# Altium PCB Assessment_2_PCB.PcbDoc (part 2 of 2)
Units mil, origin at the board's own origin, x right, y up, seen from the top; angles counter-clockwise.
Board outline 3937.01 x 2755.91 mil, 2 copper layers (Top Layer, Bottom Layer); 59 components, 57 nets, 310 pads, 181 vias.
Unrouted connection lines stored in the file: 6.
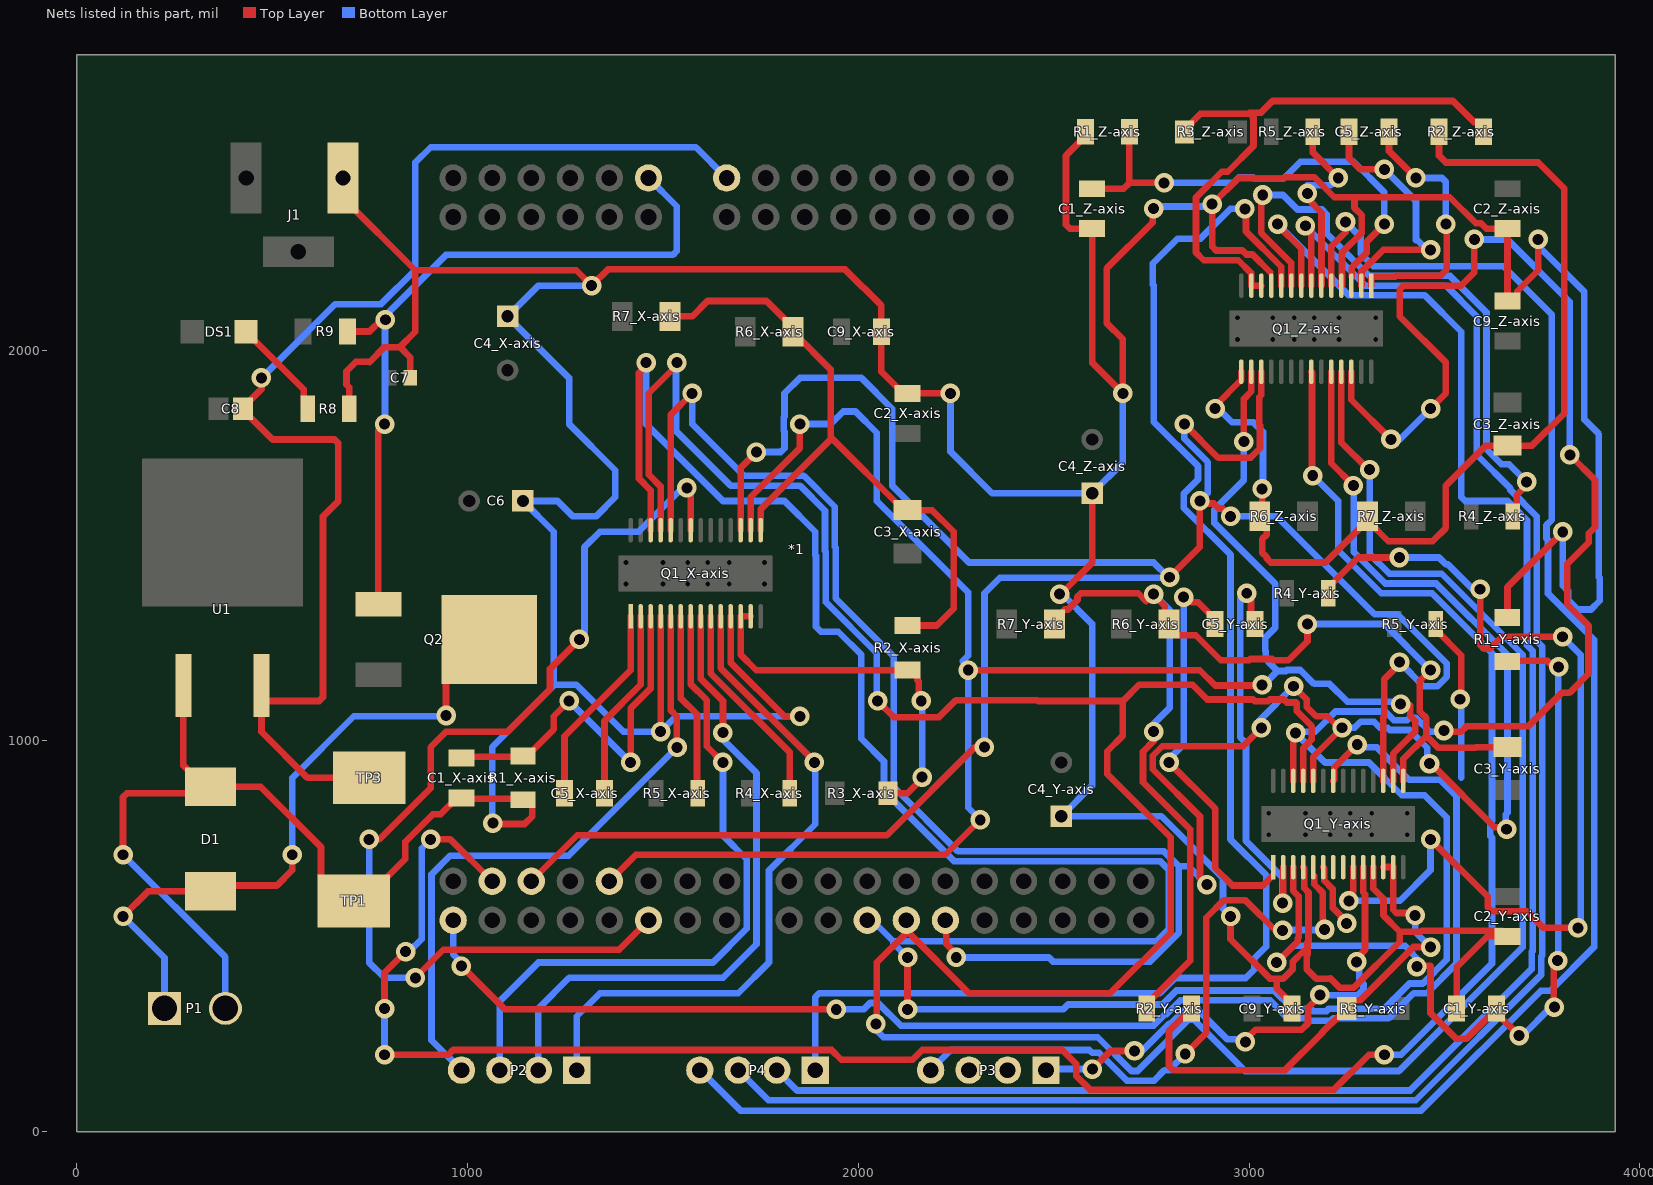
[diagram p2: the nets of this part, all layers, seen from the top]

## Via types
v1: diameter 50, hole 28, Top Layer to Bottom Layer, 181 vias

## Nets (pads, with @x,y where several pads share a name; then routed paths per layer and width w, separated by ;. In a path a pad name is that pad's centre, name@x,y a point inside that pad or via, vN(x,y) a via of type N, cw(c..) or ccw(c..) an arc to the next point about the centre after c; other vN are vias at no path point) (continued)
MODEL_0: *1.J2_10 Q1_X-axis.24 Q1_Y-axis.24 Q1_Z-axis.24 | length 6656.1
  Top Layer w17: Q1_X-axis.24@1519.69,1539.37 1519.69,1834.65 v1(1574.8,1889.76) ; *1.J2_10@2222.99,540.94 2224.97,538.97 2224.97,480.44 2250.65,454.76 v1(2250.65,445.83) ; v1(2891.94,632.05) 2889.83,632.05 2874.49,647.39 2874.49,806.98 2753.78,927.69 2753.78,962.07 2778.09,986.38 2984.51,986.38 v1(3031.5,1033.37) ; v1(3114.09,1139.89) 3147.48,1106.5 3147.48,1087.3 3171.79,1062.99 3200.27,1062.99 3229.53,1033.73 v1(3238.46,1033.73) 3164.37,959.65 Q1_Y-axis.24@3164.37,897.64 ; Q1_Z-axis.24@3210.63,1944.88 3210.63,1710.63 3267.23,1654.03 v1(3267.23,1653.54) ; v1(3461.95,942.12) 3465.71,942.12 3629.02,778.81 3646.08,778.81 3650.97,773.92 v1(3659.29,773.92)
  Bottom Layer w17: v1(1574.8,1889.76) 1574.8,1811.02 1707.28,1678.54 1860.75,1678.54 1939.76,1599.53 1939.76,1496.72 1941.89,1494.59 1941.89,1365.19 2090.87,1216.21 2090.87,881.93 2255.36,717.44 2782.48,717.44 2820.28,679.65 ; v1(2250.65,445.83) 2487.66,445.83 2498.29,435.2 2746.77,435.2 2820.28,508.71 2820.28,679.65 ; v1(2891.94,632.05) 2844.34,679.65 2820.28,679.65 ; v1(3031.5,1033.37) 3026.57,1038.29 3026.57,1052.37 v1(3114.09,1139.89) ; v1(3238.46,1033.73) 3270.31,1033.73 3285.59,1049.01 3319.96,1049.01 3335.24,1033.73 3354.6,1033.73 3360.41,1027.92 3410.94,1027.92 3456.2,982.66 3456.2,947.86 v1(3461.95,942.12) ; v1(3267.23,1653.54) 3267.72,1653.06 3267.72,1484.02 3348.78,1402.95 3478.94,1402.95 3661.42,1220.47 3661.42,816.38 3657.29,812.25 3657.29,775.92 v1(3659.29,773.92)
MODEL_1: *1.J2_8 Q1_X-axis.25 Q1_Y-axis.25 Q1_Z-axis.25 | length 8510.1
  Top Layer w17: Q1_X-axis.25@1494.09,1539.37 1494.09,1651.5 1463.73,1681.86 1463.73,1889.76 1535.43,1961.46 v1(1535.43,1968.5) ; v1(2045.11,275.59) 2047.24,277.72 2047.24,433.07 2122.99,508.82 *1.J2_8@2122.99,514.8 ; v1(2049.37,1102.36) 2090.87,1060.86 2206.61,1060.86 2250.24,1104.49 2458.13,1104.49 2460.26,1102.36 2677.17,1102.36 ; *1.J2_8@2122.99,540.94 *1.J2_8@2122.99,514.8 ; Q1_Y-axis.25@3138.78,897.64 3138.78,981.65 3160.61,1003.48 3160.61,1037.86 3122.48,1075.99 3122.48,1096.14 3120.23,1098.39 3096.9,1098.39 3089.18,1106.1 3052.97,1106.1 3048.69,1101.82 3014.31,1101.82 3010.03,1106.1 2893.15,1106.1 2855.39,1143.86 2718.67,1143.86 2677.17,1102.36 ; Q1_Z-axis.25@3236.22,1944.88 3236.22,1763.78 3305.44,1694.56 v1(3308.73,1694.56) ; *1.J2_8@2122.99,514.8 2283.46,354.33 2644.57,354.33 2799.49,509.26 2799.49,752.99 2637.13,915.36 2637.13,973.8 2677.17,1013.84 2677.17,1102.36
  Bottom Layer w17: v1(1535.43,1968.5) 1533.3,1966.37 1533.3,1793.47 1673.23,1653.54 1850.39,1653.54 1914.76,1589.17 1914.76,1486.37 1916.89,1484.24 1916.89,1354.84 2047.24,1224.49 2047.24,1104.49 v1(2049.37,1102.36) ; v1(2045.11,275.59) 2047.24,273.46 2047.24,258.54 2064.08,241.7 2612.99,241.7 2699.35,155.35 2714.41,155.35 2845.28,286.23 2859.36,286.23 2990.24,155.35 3383.7,155.35 3700.79,472.44 3700.79,1220.47 3493.31,1427.95 3359.14,1427.95 3308.73,1478.36 v1(3308.73,1694.56)
MODEL_2: *1.J2_6 Q1_X-axis.26 Q1_Y-axis.26 Q1_Z-axis.26 | length 9530.9
  Top Layer w17: v1(1456.69,1968.5) 1456.69,1960 1438.73,1942.05 1438.73,1671.5 1468.5,1641.73 Q1_X-axis.26@1468.5,1539.37 ; v1(2125.98,312.83) v1(2125.98,445.83) ; Q1_Y-axis.26@3113.19,897.64 3113.25,897.7 3113.25,1014.81 v1(3119.11,1020.67) ; Q1_Z-axis.26@3261.81,1944.88 3261.81,1873.21 v1(3363.36,1771.65) ; v1(3464.57,1850.39) 3503.94,1889.76 3503.94,1968.5 3385.83,2086.61 3385.83,2155.4 3395.79,2165.35 3543.31,2165.35 3576.6,2198.65 v1(3576.6,2283.46) ; v1(3498.95,1026.67) 3500.89,1026.67 3503.94,1023.62 3543.31,1023.62 3557.68,1037.99 3715.16,1037.99 3800.22,1123.05 3819.83,1123.05 3868.9,1172.12 3868.9,1295.14 3814.64,1349.4 3814.64,1452.8 3869.47,1507.64 3869.47,1530.97 3885.4,1546.89 3885.4,1667.91 v1(3821.03,1732.28)
  Bottom Layer w17: v1(1456.69,1968.5) 1456.69,1811.02 1653.54,1614.17 1811.02,1614.17 1889.76,1535.43 1889.76,1476.01 1891.89,1473.88 1891.89,1292.24 1904.61,1279.53 1948.82,1279.53 2007.87,1220.47 2007.87,1005.7 2065.87,947.7 2065.87,871.58 2245.01,692.44 2772.12,692.44 2795.28,669.29 2795.28,519.06 2763.54,487.33 2089.37,487.33 2035.75,540.94 *1.J2_6@2022.99,540.94 ; 2089.37,482.45 v1(2125.98,445.83) ; v1(2125.98,312.83) 2524.11,312.83 2536.87,325.59 2778.58,325.59 2814.22,361.23 3064.24,361.23 3110.51,314.96 3157.65,314.96 3164.04,308.57 3198.41,308.57 3204.8,314.96 3346.46,314.96 3410.83,379.33 3444.93,379.33 3506.07,440.47 3506.07,804.47 3449.5,861.04 3390.93,861.04 3307.09,944.88 3194.9,944.88 v1(3119.11,1020.67) 3122.02,1023.58 3169.61,1023.58 3221.27,1075.23 3348.45,1075.23 3370.77,1052.92 3405.15,1052.92 3410.96,1058.73 3427.33,1058.73 3462.44,1023.62 3495.89,1023.62 v1(3498.95,1026.67) ; v1(3363.36,1771.65) 3385.83,1771.65 v1(3464.57,1850.39) ; v1(3576.6,2283.46) 3661.42,2283.46 3821.03,2123.85 v1(3821.03,1732.28)
Net*1_J24_2: *1.J24_2 Q2.1 R9.2 | length 1887.9
  Top Layer w17: R9.2@692.68,2047.99 748.78,2047.99 778.82,2078.03 v1(789.78,2078.03) ; Q2.1@771.65,1350 771.65,1795.28 v1(787.4,1811.02)
  Bottom Layer w17: v1(787.4,1811.02) 788.59,1812.21 788.59,2076.84 v1(789.78,2078.03) ; v1@787.4,2078.03 787.4,2086.61 944.88,2244.09 1525.47,2244.09 1535.43,2254.05 1535.43,2368.5 *1.J24_2@1462.99,2440.94
Net*1_J25_16: *1.J25_16 C8.2 TP3.1 U1.3 | length 3324
  Top Layer w17: U1.3@472.44,1141.73 U1.3@472.44,1114.53 ; v1(472.44,1929.13) 472.44,1900.59 425.2,1853.35 C8.2@425.2,1850.39 425.2,1847.44 500.98,1771.65 659.33,1771.65 669.29,1761.7 669.29,1614.17 629.92,1574.8 629.92,1112.32 619.96,1102.36 484.61,1102.36 U1.3@472.44,1114.53 ; TP3.1@787.4,905.51 590.55,905.51 472.44,1023.62 U1.3@472.44,1114.53
  Bottom Layer w17: v1(472.44,1929.13) 661.34,2118.03 778.72,2118.03 866.14,2205.45 866.14,2480.31 905.51,2519.68 1584.25,2519.68 *1.J25_16@1662.99,2440.94
NetC5_X-axis_1: C5_X-axis.1 Q1_X-axis.2 | length 491.1
  Top Layer w17: C5_X-axis.1@1350.39,866.14 1350.39,1051.18 1442.91,1143.7 Q1_X-axis.2@1442.91,1318.9
NetC5_X-axis_2: C5_X-axis.2 Q1_X-axis.1 | length 522.9
  Top Layer w17: C5_X-axis.2@1248.03,866.14 1248.03,1011.81 1417.32,1181.1 Q1_X-axis.1@1417.32,1318.9
NetC5_Y-axis_1: C5_Y-axis.1 Q1_Y-axis.2 | length 1035.8
  Top Layer w17: v1(2994.26,1377.95) 2994.26,1369.02 3005.1,1358.18 3005.1,1309.86 C5_Y-axis.1@3015.75,1299.21 ; v1(3085.76,584.93) 3085.76,592.58 3079.33,599.01 3087.6,607.28 Q1_Y-axis.2@3087.6,677.17
  Bottom Layer w17: v1(2994.26,1377.95) 2992.13,1377.95 2977.76,1363.58 2977.76,1009.11 2992.13,994.74 2992.13,744.02 3085.76,650.39 3085.76,594.55 3080.94,589.74 v1(3085.76,584.93)
NetC5_Y-axis_2: C5_Y-axis.2 Q1_Y-axis.1 | length 1048.4
  Top Layer w17: v1(2795.28,944.88) 2913.39,826.77 2913.39,674.24 2957.5,630.13 3035.37,630.13 Q1_Y-axis.1@3059.41,654.17 ; v1(2832.52,1367.84) 2841.45,1367.84 2854.15,1355.14 2869.27,1355.14 2913.39,1311.02 C5_Y-axis.2@2913.39,1299.21
  Bottom Layer w17: v1(2795.28,944.88) 2795.28,953.81 2832.52,991.05 v1(2832.52,1367.84)
NetC5_Z-axis_1: C5_Z-axis.1 Q1_Z-axis.2 | length 667.6
  Top Layer w17: C5_Z-axis.1@3255.91,2559.06 3255.91,2492.13 3285.23,2462.8 v1(3346.46,2462.8) ; Q1_Z-axis.2@3287.4,2165.35 3287.99,2165.94 3287.99,2201.09 3343.76,2256.85 v1(3464.57,2256.85)
  Bottom Layer w17: v1(3346.46,2462.8) 3427.33,2381.93 3427.33,2281.33 3431.16,2281.33 3455.64,2256.85 v1(3464.57,2256.85)
NetC5_Z-axis_2: C5_Z-axis.2 Q1_Z-axis.1 | length 674.9
  Top Layer w17: Q1_Z-axis.1@3312.99,2165.35 3312.99,2185.76 3315.59,2188.35 3373.47,2188.35 3375.47,2190.35 3489.57,2190.35 3506.07,2206.85 3506.07,2320.7 v1(3503.94,2322.83) ; C5_Z-axis.2@3358.27,2559.06 3358.27,2509.68 3427.01,2440.94 v1(3427.33,2440.94)
  Bottom Layer w17: v1(3427.33,2440.94) 3493.98,2440.94 3503.94,2430.99 v1(3503.94,2322.83)
NetD1_1: D1.1 P1.1 Q2.4 | length 1700.5
  Top Layer w17: v1(118.11,551.18) 181.85,614.92 D1.1@342.28,614.92 357.28,629.92 511.81,629.92 551.18,669.29 v1(551.18,708.66) ; v1(944.88,1065.12) 944.88,1154.17 1050.56,1259.84 Q2.4@1055.12,1259.84
  Bottom Layer w17: v1(118.11,551.18) 224.17,445.12 P1.1@224.17,315.71 ; v1(551.18,708.66) 551.18,905.51 708.66,1062.99 942.75,1062.99 v1(944.88,1065.12)
NetDS1_1: DS1.1 R8.1 | length 262.1
  Top Layer w17: DS1.1@433.07,2047.24 580.35,1899.96 580.35,1860.59 R8.1@590.55,1850.39
NetP2_1: P2.1 Q1_X-axis.10 | length 1721.9
  Top Layer w17: Q1_X-axis.10@1647.64,1318.9 1647.64,1187.01 1887.63,947.01 v1(1887.63,944.88)
  Bottom Layer w17: P2.1@1279.53,157.48 1279.53,295.28 1338.58,354.33 1692.59,354.33 1771.49,433.23 1771.49,668.65 1889.76,786.92 1889.76,942.75 v1(1887.63,944.88)
NetP2_2: P2.2 Q1_X-axis.8 | length 1682.6
  Top Layer w17: Q1_X-axis.8@1596.46,1318.9 1596.46,1159.45 1653.54,1102.36 v1(1653.54,1021.49)
  Bottom Layer w17: P2.2@1181.1,157.48 1181.1,314.96 1259.84,393.7 1653.54,393.7 1739.49,479.65 1739.49,917.62 1653.54,1003.57 v1(1653.54,1021.49)
NetP2_3: P2.3 Q1_X-axis.7 | length 1744.4
  Top Layer w17: Q1_X-axis.7@1570.87,1318.9 1570.87,1145.67 1612.04,1104.49 1612.04,986.38 v1(1653.54,944.88)
  Bottom Layer w17: P2.3@1082.68,157.48 1082.68,334.65 1181.1,433.07 1627.95,433.07 1714.49,519.61 1714.49,697.33 1653.54,758.27 v1(1653.54,944.88)
NetP2_4: P2.4 Q1_X-axis.5 | length 1637.7
  Top Layer w17: Q1_X-axis.5@1519.69,1318.9 1519.69,1078.74 1535.43,1062.99 1535.43,984.28 v1(1536.01,983.7)
  Bottom Layer w17: P2.4@984.25,157.48 907.64,234.09 907.64,658.43 955.75,706.53 1258.84,706.53 v1(1536.01,983.7)
NetP3_1: P3.1 Q1_Y-axis.10 | length 1332.3
  Top Layer w17: v1(2598.98,160.27) 2645.22,206.51 v1(2706.88,206.51) ; v1(2990.69,229.83) 2990.69,234.79 3017.13,261.22 3134.95,261.22 3150.87,277.14 3150.87,317.17 3174.91,341.22 3174.91,350.07 v1(3181.22,350.07) ; v1(3275.4,434.4) 3275.4,443.33 3296.98,464.91 3296.98,607.74 3292.32,612.39 Q1_Y-axis.10@3292.32,677.17
  Bottom Layer w17: P3.1@2480.32,157.48 2483.1,160.27 2597.87,160.27 2598.43,159.71 v1(2598.98,160.27) ; v1(2706.88,206.51) 2709.49,203.89 2723.58,203.89 2795.28,275.59 2799.29,275.59 2834.93,311.23 2869.72,311.23 2944.8,236.14 2984.38,236.14 v1(2990.69,229.83) ; v1(3181.22,350.07) 3181.22,349.49 3278.91,349.49 3293.08,363.66 3293.08,377.74 3281.72,389.1 3281.72,428.09 v1(3275.4,434.4)
NetP3_2: P3.2 Q1_Y-axis.8
NetP3_3: P3.3 Q1_Y-axis.7
NetP3_4: P3.4 Q1_Y-axis.5 | length 1613.2
  Top Layer w17: v1(2836.78,198.98) 2890.52,252.72 2890.52,547.63 2935.57,592.68 2990,592.68 3070.87,511.81 3074.08,515.03 v1(3085.76,515.03) ; Q1_Y-axis.5@3166.96,654.17 3166.96,633.12 3188.98,611.11 3188.98,522.18 v1(3193.76,517.4)
  Bottom Layer w17: P3.4@2185.04,157.48 2236.54,208.98 2591.21,208.98 2598.43,201.77 2616.17,201.77 2687.58,130.35 2756.81,130.35 2783.94,157.48 2795.28,157.48 v1(2836.78,198.98) ; v1(3085.76,515.03) 3088.98,511.81 3093.38,516.22 3192.57,516.22 v1(3193.76,517.4)
NetP4_1: P4.1 Q1_Z-axis.10 | length 3839.3
  Top Layer w17: v1(2989.42,2361.66) 2992.13,2358.95 2992.13,2304.25 3082.68,2213.7 Q1_Z-axis.10@3082.68,2165.35
  Bottom Layer w17: P4.1@1889.76,157.48 1889.76,344.37 1899.72,354.33 2771.96,354.33 2810.9,393.27 2991.69,393.27 3013.39,414.96 3013.39,443.04 3044.26,473.91 3044.26,656.53 2952.76,748.03 2952.76,1476.74 2832.52,1596.98 2832.52,1632.09 2869.37,1668.95 2869.37,1703.33 2755.91,1816.8 2755.91,2165.72 2753.78,2167.85 2753.78,2221.91 2817.46,2285.59 2876.15,2285.59 2952.76,2362.2 2988.87,2362.2 v1(2989.42,2361.66)
NetP4_2: P4.2 Q1_Z-axis.8 | length 4620.5
  Top Layer w17: v1(3073,2322.83) 3073,2320.7 3133.86,2259.84 Q1_Z-axis.8@3133.86,2165.35
  Bottom Layer w17: P4.2@1791.34,157.48 1843.47,105.35 3412.44,105.35 3723.31,416.23 3723.31,459.61 3725.79,462.09 3725.79,1230.83 3711.47,1245.14 3711.47,1564.12 3661.42,1614.17 3553.27,1614.17 3543.31,1624.13 3543.31,2047.24 3450.2,2140.35 3255.48,2140.35 v1(3073,2322.83)
NetP4_3: P4.3 Q1_Z-axis.7 | length 4673.3
  Top Layer w17: v1(3144.13,2318.58) 3149.49,2318.58 3159.45,2308.62 Q1_Z-axis.7@3159.45,2165.35
  Bottom Layer w17: P4.3@1692.91,157.48 1770.04,80.35 3426.81,80.35 3748.31,401.86 3748.31,449.26 3750.79,451.73 3750.79,1241.18 3736.47,1255.5 3736.47,1574.47 3668.95,1642 3668.95,1646.01 3582.68,1732.28 3582.68,2086.61 3503.94,2165.35 3297.35,2165.35 v1(3144.13,2318.58)
NetP4_4: P4.4 Q1_Z-axis.5 | length 5009.4
  Top Layer w17: Q1_Z-axis.5@3210.63,2165.35 3210.63,2265.75 3246.98,2302.09 v1(3246.98,2328.52)
  Bottom Layer w17: P4.4@1594.49,157.48 1698.23,53.74 3440.3,53.74 3746.84,360.29 3771.17,360.29 3883.27,472.38 3883.27,1258.91 3765.16,1377.02 3765.16,1514.31 3761.47,1517.99 3761.47,1552.37 3775.27,1566.16 3775.27,2090.87 3650.79,2215.35 3318.06,2215.35 3285.68,2247.74 3285.68,2289.82 v1(3246.98,2328.52)
NetQ1_X-axis_6: Q1_X-axis.6 R5_X-axis.1 | length 470.7
  Top Layer w17: Q1_X-axis.6@1545.28,1318.9 1545.28,1110.06 1587.04,1068.29 1587.04,867.68 R5_X-axis.1@1588.58,866.14
NetQ1_X-axis_9: Q1_X-axis.9 R4_X-axis.1 | length 536.7
  Top Layer w17: Q1_X-axis.9@1622.05,1318.9 1622.05,1173.23 1824.8,970.47 R4_X-axis.1@1824.8,866.14
NetQ1_X-axis_12: Q1_X-axis.12 Q1_X-axis.13 R2_X-axis.1 R3_X-axis.2 | length 970.1
  Top Layer w17: Q1_X-axis.13@1724.41,1318.9 Q1_X-axis.12@1698.82,1318.9 1698.82,1221.06 1738.78,1181.1 R2_X-axis.1@2125.98,1181.1 2137.8,1181.1 2150.95,1167.95 2150.95,1156.14 2154.78,1152.31 2154.78,1108.68 v1(2161.09,1102.36) ; R3_X-axis.2@2075.79,866.14 2125.99,866.14 2163.22,903.38 v1(2163.22,907.48)
  Bottom Layer w17: v1(2161.09,1102.36) 2163.22,1100.23 v1(2163.22,907.48)
NetQ1_Y-axis_6: Q1_Y-axis.6 R5_Y-axis.1 | length 616.3
  Top Layer w17: Q1_Y-axis.6@3189.96,677.17 3192.56,674.57 3192.56,642.88 3213.98,621.46 3213.98,573.36 3235.26,552.08 3235.26,547.25 v1(3249.66,532.84) ; R5_Y-axis.1@3478.35,1299.21 3478.35,1284.45 3543.31,1219.49 3543.31,1102.36 3540.45,1099.5 v1(3540.45,1106.62)
  Bottom Layer w17: v1@3533.32,1099.5 v1(3540.45,1106.62) 3543.31,1103.76 3543.31,905.51
NetQ1_Y-axis_9: Q1_Y-axis.9 R4_Y-axis.1 | length 2541.9
  Top Layer w17: R4_Y-axis.1@3202.76,1377.95 3202.76,1392.72 3279.49,1469.45 v1(3384.84,1469.45) v1@3384.84,1456.69 ; v1(3255.48,590.55) 3255.48,604.13 3266.73,615.39 Q1_Y-axis.9@3266.73,677.17 ; v1(3464.57,748.03) 3611.45,601.15 3611.45,573.87 3621.39,563.94 3711.28,563.94 3753.75,521.48 v1(3841.77,521.48) 3842.24,521.01 v1@3841.77,520.54 ; v1@3599.06,1380.89 v1(3591.73,1388.22) 3591.73,1245.52 3601.69,1235.56 3615.77,1235.56 3646.89,1266.68 v1(3802.4,1266.68)
  Bottom Layer w17: v1(3255.48,590.55) 3385.83,590.55 3464.57,669.29 v1(3464.57,748.03) ; v1(3384.84,1469.45) 3486.11,1469.45 3503.11,1452.45 3508.18,1452.45 3582.07,1378.56 v1(3591.73,1388.22) ; v1(3802.4,1266.68) 3848.6,1220.47 3848.6,521.48 v1(3841.77,521.48)
NetQ1_Y-axis_12: Q1_Y-axis.12 Q1_Y-axis.13 R2_Y-axis.1 R3_Y-axis.2 | length 1275.9
  Top Layer w17: R2_Y-axis.1@2852.36,314.96 2795.28,257.87 2795.28,167.44 2805.23,157.48 3092.52,157.48 3186.85,251.8 3186.85,253.41 3211.16,277.72 3212.76,277.72 3228.97,293.93 3233.9,293.93 3250,310.04 R3_Y-axis.2@3250,314.96 3250,319.88 3266.11,335.99 3284.2,335.99 3420.66,472.44 v1(3464.57,472.44) ; Q1_Y-axis.12@3343.5,677.17 Q1_Y-axis.13@3369.1,677.17 3369.1,567.91 3377.38,559.63 3418.88,559.63 v1(3425.2,553.31)
  Bottom Layer w17: v1(3425.2,553.31) 3425.2,511.81 v1(3464.57,472.44)
NetQ1_Z-axis_6: Q1_Z-axis.6 R5_Z-axis.1 | length 503.5
  Top Layer w17: v1(3149.61,2401.58) 3149.61,2388.07 3185.63,2352.04 3185.63,2165.94 Q1_Z-axis.6@3185.04,2165.35 ; R5_Z-axis.1@3163.39,2559.06 3163.39,2505.91 v1(3228.35,2440.94)
  Bottom Layer w17: v1(3149.61,2401.58) 3149.61,2422.16 3209.57,2422.16 v1(3228.35,2440.94)
NetQ1_Z-axis_9: Q1_Z-axis.9 R4_Z-axis.1 | length 1585
  Top Layer w17: v1(3035.16,2397.32) 3031.5,2393.65 3031.5,2300.23 3107.68,2224.05 3107.68,2165.94 Q1_Z-axis.9@3108.27,2165.35 ; R4_Z-axis.1@3675.2,1574.8 3685.4,1585 3685.4,1629.22 3710.45,1654.27 v1(3710.45,1663.2)
  Bottom Layer w17: v1(3035.16,2397.32) 3039.42,2401.57 3043.68,2397.32 3086.83,2397.32 3124.06,2360.08 3186.85,2360.08 3199,2347.92 3199,2299.06 3307.71,2190.35 3514.29,2190.35 3607.68,2096.97 3607.68,1746.65 3646.25,1708.09 3665.56,1708.09 v1(3710.45,1663.2)
NetQ1_Z-axis_12: Q1_Z-axis.12 Q1_Z-axis.13 R2_Z-axis.1 R3_Z-axis.2 | length 1492.8
  Top Layer w17: R3_Z-axis.2@2834.65,2559.06 2834.65,2563.98 2875.75,2605.08 3001.91,2605.08 ; Q1_Z-axis.12@3031.5,2165.35 Q1_Z-axis.13@3005.91,2165.35 3005.31,2165.94 3005.31,2197.63 2972.6,2230.35 2883.97,2230.35 2864.22,2250.11 2864.22,2391.05 2930.04,2456.87 2945.75,2456.87 3011.58,2522.69 3011.58,2595.42 3001.91,2605.08 ; R2_Z-axis.1@3600.39,2559.06 3600.39,2570.87 3587.24,2584.02 3575.43,2584.02 3521.65,2637.8 3060.33,2637.8 3030.74,2608.21 3001.91,2608.21 3001.91,2605.08
RESET: *1.J1_9 Q1_X-axis.16 Q1_Y-axis.16 Q1_Z-axis.16 | length 5006
  Top Layer w17: *1.J1_9@1362.99,640.94 1430.71,708.66 2222.59,708.66 v1(2312.08,798.15) ; Q1_X-axis.16@1724.41,1539.37 1724.41,1623.7 1850.39,1749.69 v1(1850.39,1811.02) ; v1(2281.33,1181.1) 2874.02,1181.1 2913.39,1141.73 3031.5,1141.73 3031.5,1143.32 v1(3033.63,1143.32) ; v1(2986.73,1766.25) 2986.73,1875.54 3005.91,1894.72 Q1_Z-axis.16@3005.91,1944.88 ; Q1_Y-axis.16@3369.1,897.64 3369.1,967.52 3425.2,1023.62 3425.2,1051.7 3412.44,1064.46 3412.44,1090.71 3409.23,1093.92 3394.27,1093.92 3390.86,1097.32 v1(3387.96,1094.42)
  Bottom Layer w17: v1(1850.39,1811.02) 1929.13,1811.02 1961.46,1843.35 1992.74,1843.35 2047.24,1788.84 2047.24,1614.17 2281.33,1380.08 2281.33,1218.34 2268.14,1205.14 2268.14,1203.23 2281.33,1190.03 v1(2281.33,1181.1) 2281.33,828.9 v1(2312.08,798.15) ; v1(2986.73,1766.25) 2986.73,1667.46 2911.26,1591.99 2911.26,1557.61 3067.36,1401.51 3067.36,1289.27 3066.16,1289.27 3041.85,1264.96 3041.85,1230.58 3042.98,1229.44 3042.98,1215.91 3048.92,1209.97 3048.92,1203.28 3073.23,1178.97 ; v1(3033.63,1143.32) 3037.58,1143.32 3073.23,1178.97 ; v1(3387.96,1094.42) 3387.96,1100.23 3251.93,1100.23 3206.17,1145.99 3166.67,1145.99 3131.28,1181.39 3096.9,1181.39 3094.48,1178.97 3073.23,1178.97
SLEEP: *1.J1_5 Q1_X-axis.17 Q1_Y-axis.17 Q1_Z-axis.17 | length 6160.6
  Top Layer w17: *1.J1_5@1162.99,640.94 1280.71,758.66 2073.09,758.66 2298.68,984.25 v1(2322.83,984.25) ; Q1_X-axis.17@1698.82,1539.37 1698.82,1698.82 v1(1739.34,1739.34) ; v1(2796.92,1418.96) 2874.02,1496.06 v1(2874.02,1614.17) 2880.33,1607.86 2909.74,1607.86 2922.57,1595.03 2932.53,1595.03 v1(2952.76,1574.8) ; v1(2834.65,1811.02) 2920.92,1724.75 3003.92,1724.75 3028.23,1749.06 3028.23,1807.96 3025.86,1810.33 3025.86,1879.32 3031.5,1884.95 Q1_Z-axis.17@3031.5,1944.88 ; Q1_Y-axis.17@3343.5,897.64 3343.5,1060.04 3346.46,1062.99 3346.46,1158.23 3385.19,1196.97 v1(3385.19,1201.78)
  Bottom Layer w17: v1(1739.34,1739.34) 1801.07,1739.34 1811.02,1749.3 1811.02,1791.7 1808.89,1793.83 1808.89,1828.21 1811.02,1830.34 1811.02,1889.76 1850.39,1929.13 2007.87,1929.13 2086.61,1850.39 2086.61,1653.54 2283.46,1456.69 2755.91,1456.69 2793.63,1418.96 v1(2796.92,1418.96) ; v1(2322.83,984.25) 2322.83,1377.95 2362.2,1417.32 v1@2795.28,1417.32 ; v1(2834.65,1811.02) 2834.65,1773.41 2894.37,1713.69 2894.37,1634.53 v1(2874.02,1614.17) ; v1(2952.76,1574.8) 3070.87,1574.8 3321.46,1324.21 3380.15,1324.21 3506.07,1198.29 3506.07,1163.91 3481.76,1139.6 3447.38,1139.6 v1(3385.19,1201.78)
STEP_1: *1.J1_12 Q1_X-axis.22 | length 2635.8
  Top Layer w17: v1(748.03,748.03) 773.93,748.03 905.51,879.62 905.51,984.25 944.88,1023.62 1102.36,1023.62 1210.88,1132.14 1210.88,1184.38 v1(1286.34,1259.84) ; v1(866.14,393.7) 937.85,465.41 1387.46,465.41 *1.J1_12@1462.99,540.94 ; v1(1561.19,1647.84) 1561.19,1638.91 1570.87,1629.23 Q1_X-axis.22@1570.87,1539.37
  Bottom Layer w17: v1(748.03,748.03) 748.03,433.07 787.4,393.7 v1(866.14,393.7) ; v1(1286.34,1259.84) 1299.21,1259.84 1299.21,1496.06 1338.58,1535.43 1437.37,1535.43 1543.47,1641.53 1554.87,1641.53 v1(1561.19,1647.84)
STEP_2: *1.J1_2 Q1_Y-axis.22 | length 3714.5
  Top Layer w17: v1(984.25,423.91) 1095.33,312.83 v1(1943.5,312.83) ; Q1_Y-axis.22@3215.55,897.64 3218.15,900.23 3218.15,931.92 3276.62,990.4 v1(3277,990.4)
  Bottom Layer w17: *1.J1_2@962.99,540.94 962.99,454.1 984.25,432.84 v1(984.25,423.91) ; v1(1943.5,312.83) 2013.55,312.83 2030.05,329.33 2050.79,329.33 2108.79,271.33 2755.66,271.33 2784.92,300.59 2788.94,300.59 2824.57,336.23 3053.89,336.23 3100.16,289.96 3147.29,289.96 3153.68,283.57 3208.77,283.57 3215.16,289.96 3356.81,289.96 3421.18,354.33 3455.28,354.33 3531.07,430.11 3531.07,858.63 3489.08,900.62 3409.67,900.62 3326.2,984.08 3283.32,984.08 v1(3277,990.4)
STEP_3: *1.J1_3 Q1_Z-axis.22 | length 5647.3
  Top Layer w17: v1(787.4,196.85) 950.79,196.85 962.92,208.98 1931.6,208.98 1956.49,184.09 2138.82,184.09 2163.71,208.98 2522.15,208.98 2557.48,173.65 2557.48,143.08 2593.07,107.48 3217.72,107.48 3307.09,196.85 v1(3346.46,196.85) ; v1(787.4,314.96) 787.4,406.66 v1(841.51,460.77) ; v1(905.51,748.03) 905.62,747.93 956.01,747.93 *1.J1_3@1062.99,640.94 ; Q1_Z-axis.22@3159.45,1944.88 3161.33,1943 3161.33,1681.19 v1(3163.2,1679.32)
  Bottom Layer w17: v1(787.4,196.85) v1(787.4,314.96) ; v1(841.51,460.77) 850.44,460.77 882.64,492.97 882.64,725.16 v1(905.51,748.03) ; v1(3163.2,1679.32) 3228.35,1614.17 3228.35,1488.03 3338.43,1377.95 3468.58,1377.95 3622.05,1224.49 3622.05,795.37 3617.79,791.11 3617.79,756.73 3622.05,752.47 3622.05,429.96 3388.93,196.85 v1(3346.46,196.85)
V3P3OUT_X-axis: C3_X-axis.1 Q1_X-axis.15 R2_X-axis.2 R6_X-axis.1 R7_X-axis.1 | length 1740.4
  Top Layer w17: R7_X-axis.1@1517.72,2086.61 1574.8,2086.61 1614.17,2125.98 1764.76,2125.98 1832.68,2058.07 R6_X-axis.1@1832.68,2047.24 1929.13,1950.79 1929.13,1777.56 ; Q1_X-axis.15@1750,1539.37 1750,1592.52 1929.13,1771.65 1929.13,1777.56 ; R2_X-axis.2@2125.98,1295.28 2200.79,1295.28 2244.09,1338.58 2244.09,1535.43 2188.98,1590.55 C3_X-axis.1@2125.98,1590.55 2116.14,1590.55 1929.13,1777.56
V3P3OUT_Y-axis: C3_Y-axis.1 Q1_Y-axis.15 R2_Y-axis.2 R6_Y-axis.1 R7_Y-axis.1 | length 2960.6
  Top Layer w17: R7_Y-axis.1@2501.97,1299.21 2501.97,1310.04 2528.38,1336.45 2536.87,1336.45 2561.18,1360.76 2561.18,1369.26 2569.88,1377.95 2716.54,1377.95 2737.29,1357.2 ; R2_Y-axis.2@2738.19,314.96 2738.19,326.77 2849.49,438.07 2849.49,773.71 2728.78,894.42 2728.78,972.43 2755.91,999.56 v1(2755.91,1023.62) ; v1(2755.91,1375.82) 2755.91,1373.94 2784.73,1345.11 2784.73,1309.76 R6_Y-axis.1@2795.28,1299.21 2795.28,1288.39 2813.35,1270.31 2863.83,1270.31 2927.76,1206.39 3000.52,1206.39 3003.95,1209.82 3059.04,1209.82 3062.48,1206.39 3100.66,1206.39 3149.61,1255.34 v1(3149.61,1299.21) ; Q1_Y-axis.15@3394.69,897.64 3394.69,953.74 3453.94,1012.99 ; v1(3464.57,1181.1) 3437.44,1153.97 3437.44,1074.82 3453.94,1058.32 3453.94,1012.99 ; C3_Y-axis.1@3661.42,984.25 3581.37,984.25 3579.24,982.12 3484.81,982.12 3453.94,1012.99
  Bottom Layer w17: v1(2755.91,1023.62) 2755.91,1043.67 2797.41,1085.17 2797.41,1334.32 v1(2755.91,1375.82) ; v1(3149.61,1299.21) 3346.46,1299.21 v1(3464.57,1181.1)
V3P3OUT_Z-axis: C3_Z-axis.1 Q1_Z-axis.15 R2_Z-axis.2 R6_Z-axis.1 R7_Z-axis.1 | length 2647.6
  Top Layer w17: v1(2913.39,1850.39) 2913.39,1857.55 2980.31,1924.48 Q1_Z-axis.15@2980.31,1944.88 ; v1(3033.63,1644.97) 3033.63,1580.87 R6_Z-axis.1@3027.56,1574.8 3045.63,1556.73 3045.63,1528.49 3033.63,1516.48 3033.63,1482.1 3045.63,1470.09 3045.63,1466.65 3055.59,1456.69 3195.87,1456.69 R7_Z-axis.1@3303.15,1563.98 ; R7_Z-axis.1@3303.15,1574.8 R7_Z-axis.1@3303.15,1563.98 ; R2_Z-axis.2@3486.22,2559.06 3486.22,2498.03 3503.94,2480.32 3740.16,2480.32 3806.66,2413.82 3806.66,1838.15 3724.41,1755.91 C3_Z-axis.1@3661.42,1755.91 3606.3,1755.91 3503.94,1653.54 3503.94,1545.39 3469.5,1510.95 3356.17,1510.95 R7_Z-axis.1@3303.15,1563.98
  Bottom Layer w17: v1(2913.39,1850.39) 2921.91,1850.39 2957.02,1815.28 3011.45,1815.28 3035.76,1790.97 3035.76,1656 3033.63,1653.87 v1(3033.63,1644.97)
VCP_X-axis: C1_X-axis.1 Q1_X-axis.3 R1_X-axis.1 | length 973.5
  Top Layer w17: C1_X-axis.1@984.25,956.69 986.71,959.15 1139.27,959.15 R1_X-axis.1@1141.73,961.61 1152.56,961.61 1220.47,1029.53 1220.47,1062.99 v1(1259.84,1102.36) ; v1(1417.32,944.88) 1417.32,1082.75 1468.5,1133.94 Q1_X-axis.3@1468.5,1318.9
  Bottom Layer w17: v1(1259.84,1102.36) v1(1417.32,944.88)
VCP_Y-axis: C1_Y-axis.1 Q1_Y-axis.3 R1_Y-axis.1 | length 2327.3
  Top Layer w17: v1(3070.87,433.07) 3124.61,486.81 3124.61,495.19 3127.26,497.84 3127.26,602.12 3113.19,616.19 Q1_Y-axis.3@3113.19,677.17 ; v1(3429.49,422.58) 3431.24,420.83 3432.66,420.83 3440.31,428.48 3444.16,424.63 3459.31,424.63 3459.85,424.09 3464.57,424.09 3464.57,303.44 3530.65,237.36 3556.25,237.36 3608.89,290 3620.7,290 3622.05,291.34 3622.05,303.15 C1_Y-axis.1@3633.86,314.96 3633.86,303.15 v1(3691.13,245.88) ; R1_Y-axis.1@3661.42,1203.74 3662.69,1205.01 3764.07,1205.01 3779.53,1189.55 v1(3792.29,1189.55) ; v1(3781.66,318.79) 3779.53,318.79 3779.53,427.66 3779.85,427.66 v1(3789.81,437.61)
  Bottom Layer w17: v1(3070.87,433.07) 3113.7,475.9 3399.1,475.9 3417.62,457.38 3417.62,455.25 3437.85,435.03 3437.85,426.01 3432.66,420.83 3431.24,420.83 v1(3429.49,422.58) ; v1(3691.13,245.88) 3691.49,245.52 3699.58,245.52 3772.85,318.79 v1(3781.66,318.79) 3780.24,317.37 v1@3780.24,315.67 ; v1(3789.81,437.61) 3791.05,438.85 3791.05,1188.31 v1(3792.29,1189.55)
VCP_Z-axis: C1_Z-axis.1 Q1_Z-axis.3 R1_Z-axis.1 | length 1193.7
  Top Layer w17: C1_Z-axis.1@2598.43,2413.39 2679.02,2413.39 2693.9,2428.27 ; R1_Z-axis.1@2693.9,2559.06 2693.9,2428.27 ; v1(2782.6,2428.27) 2693.9,2428.27 ; Q1_Z-axis.3@3262.99,2188.35 3262.99,2211.45 3301.57,2250.02 3301.57,2277.95 v1(3346.46,2322.83)
  Bottom Layer w17: v1(2782.6,2428.27) 2960.13,2428.27 2974.94,2443.07 3009.32,2443.07 3013.58,2438.82 3088.06,2438.82 3131.69,2482.44 3268.13,2482.44 3346.46,2404.11 v1(3346.46,2322.83)
VMA_X-axis: C1_X-axis.2 C1_Y-axis.2 C1_Z-axis.2 C2_X-axis.1 C2_Y-axis.1 C2_Z-axis.1 C4_X-axis.1 C4_Y-axis.1 C4_Z-axis.1 C6.1 C7.2 C9_X-axis.1 C9_Y-axis.1 C9_Z-axis.1 D1.2 J1.1 P1.2 Q1_X-axis.4 Q1_X-axis.11 Q1_Y-axis.4 Q1_Y-axis.11 Q1_Z-axis.4 Q1_Z-axis.11 R1_X-axis.2 R1_Y-axis.2 R1_Z-axis.2 R8.2 TP1.1 U1.1 | length 17263.9
  Top Layer w17: v1(118.11,708.66) 118.11,856.18 128.07,866.14 325.79,866.14 D1.2@342.28,882.64 ; U1.1@272.44,1141.73 272.44,936.73 326.54,882.64 D1.2@342.28,882.64 ; J1.1@681.1,2440.94 681.1,2389.76 866.14,2204.72 ; R8.2@696.85,1850.39 696.85,1905.29 690.19,1911.94 690.19,1946.32 714.5,1970.63 748.88,1970.63 749.52,1969.99 787.4,2007.87 826.77,2007.87 ; C7.2@853.35,1929.13 853.35,1981.3 826.77,2007.87 ; v1(1064.63,789.53) 1066.76,787.4 1145.88,787.4 1165.71,807.24 1165.71,836.26 1152.56,849.41 R1_X-axis.2@1141.73,849.41 1139.27,851.87 986.71,851.87 C1_X-axis.2@984.25,854.33 972.44,854.33 930.51,812.4 911.19,812.4 840.5,741.71 840.5,697.39 733.66,590.55 683.66,590.55 624.64,649.57 624.64,728.31 470.32,882.64 D1.2@342.28,882.64 ; v1(1493.93,1023.62) 1493.93,1033.89 1494.69,1034.65 1494.69,1318.31 Q1_X-axis.4@1494.09,1318.9 ; Q1_X-axis.11@1673.23,1318.9 1673.23,1200.79 1811.02,1062.99 v1(1850.39,1062.99) ; v1(2235.91,1889.76) C2_X-axis.1@2125.98,1889.76 2114.17,1889.76 2059.06,1944.88 C9_X-axis.1@2059.06,2047.24 2059.06,2114.17 1966.37,2206.85 1358.93,2206.85 v1(1317.43,2165.35) 1278.06,2204.72 866.14,2204.72 ; v1(2515.26,1375.82) 2516.85,1374.23 2598.43,1455.81 C4_Z-axis.1@2598.43,1633.86 ; R1_Z-axis.2@2581.69,2559.06 2581.69,2548.23 2531.5,2498.03 2531.5,2320.98 2541.45,2311.02 C1_Z-axis.2@2598.43,2311.02 2598.43,1968.5 v1@2670.87,1896.06 ; v1(2677.17,1889.76) v1@2670.87,1896.06 ; v1(2755.91,2362.2) 2753.73,2360.03 2753.73,2326.96 2635.67,2208.89 2635.67,2069.42 2677.17,2027.92 2677.17,1902.36 v1@2670.87,1896.06 ; v1(2952.76,551.18) 2952.76,492.49 3053.68,391.57 3070.87,391.57 ; 3054.49,2199.63 3008.99,2245.13 2993.17,2245.13 2982.95,2255.35 2915.68,2255.35 2905.72,2265.31 v1(2905.72,2373.86) 2972.81,2440.94 3011.45,2440.94 3013.58,2438.82 3088.79,2438.82 3093.05,2443.08 3166.8,2443.08 3218.26,2391.62 3267.72,2391.62 ; C9_Y-axis.1@3110.24,314.96 3110.24,326.77 3070.87,366.14 3070.87,391.57 ; Q1_Y-axis.4@3138.78,677.17 3141.37,674.57 3141.37,623.36 3152.26,612.47 3152.26,487.48 3149.61,484.83 3149.61,452.39 3147.48,450.26 3147.48,415.88 3171.79,391.57 3206.17,391.57 3207.49,392.9 3231.69,368.7 3268.39,368.7 3385.83,486.14 3385.83,511.81 ; 3148.8,451.59 3138.78,461.61 3112.37,435.2 3112.37,415.88 3088.06,391.57 3070.87,391.57 ; Q1_Z-axis.4@3236.22,2165.35 3237.99,2167.13 3237.99,2249.73 3288.48,2300.21 3288.48,2345.71 3269.85,2364.33 3269.85,2389.48 3267.72,2391.62 ; Q1_Y-axis.11@3317.91,677.17 3317.91,622.16 3344.1,595.98 3344.1,553.54 3385.83,511.81 ; C1_Y-axis.2@3531.5,314.96 3531.5,421.26 3610.24,500 C2_Y-axis.1@3661.42,500 3647.48,513.94 3441.93,513.94 3439.8,511.81 3385.83,511.81 ; R1_Y-axis.2@3661.42,1315.94 3661.42,1393.62 v1(3802.97,1535.18) ; v1(3740.16,2283.46) 3740.16,2204.72 3686.38,2150.95 3686.38,2139.14 3673.23,2125.98 C9_Z-axis.1@3661.42,2125.98 C2_Z-axis.1@3661.42,2311.02 3607.74,2311.02 3593.79,2324.96 3580.55,2324.96 3513.9,2391.62 3267.72,2391.62 ; 826.77,2007.87 866.14,2047.24 866.14,2204.72
  Bottom Layer w17: v1(118.11,708.66) 380.08,446.69 P1.2@380.08,315.71 ; v1(1064.63,789.53) 1062.99,791.17 1062.99,984.25 1220.47,1141.73 ; v1(1317.43,2165.35) 1181.1,2165.35 C4_X-axis.1@1102.36,2086.61 1259.84,1929.13 1259.84,1811.02 1377.95,1692.91 1377.95,1624.13 1328.62,1574.8 1269.37,1574.8 1230,1614.17 C6.1@1141.73,1614.17 1220.47,1535.43 1220.47,1141.73 ; v1(1850.39,1062.99) 1533.3,1062.99 v1(1493.93,1023.62) 1398.7,1023.62 1278.46,1143.86 1222.6,1143.86 1220.47,1141.73 ; v1(2235.91,1889.76) 2235.91,1740.47 2342.52,1633.86 C4_Z-axis.1@2598.43,1633.86 2677.17,1712.6 v1(2677.17,1889.76) ; v1(2515.26,1375.82) 2517.55,1375.82 2519.68,1377.95 2598.43,1299.21 2598.43,885.83 C4_Y-axis.1@2519.68,807.09 2775.59,807.09 2933.44,649.24 2933.44,570.5 v1(2952.76,551.18) ; v1(2755.91,2362.2) 2761.73,2368.03 2899.89,2368.03 v1(2905.72,2373.86) ; v1(3740.16,2283.46) 3740.16,2266.96 3858.27,2148.85 3858.27,1822.46 3895.51,1785.22 3895.51,1419.45 3897.64,1417.32 3897.64,1358.63 3875.46,1336.45 3841.08,1336.45 3816.77,1360.76 3816.77,1384.1 3802.97,1397.89 v1(3802.97,1535.18)
pads on no net: *1.J1_6 *1.J1_8 *1.J1_11 *1.J1_13 *1.J1_16 *1.J2_1 *1.J2_3 *1.J2_4 *1.J2_5 *1.J2_9 *1.J2_11 *1.J2_12 *1.J2_13 *1.J2_15 *1.J2_16 *1.J2_17 *1.J2_18 *1.J2_19 *1.J2_20 *1.J24_1 *1.J24_3 *1.J24_5 *1.J24_6 *1.J24_7 *1.J24_9 *1.J24_10 *1.J24_11 *1.J24_12 *1.J25_1 *1.J25_2 *1.J25_3 *1.J25_4 *1.J25_5 *1.J25_6 *1.J25_7 *1.J25_8 *1.J25_9 *1.J25_10 *1.J25_11 *1.J25_13 *1.J25_15 Q1_X-axis.19 Q1_X-axis.23 Q1_Y-axis.19 Q1_Y-axis.23 Q1_Z-axis.19 Q1_Z-axis.23
copper on no net: | length 1614.2
  Bottom Layer w17: 1692.91,21889.76 3307.09,21889.76

## Text inside footprints (layer, text, board x,y; h text height)
C4_X-axis: Top Overlay "+" at 1072.83,2244.09 h60 r270
C4_Y-axis: Top Overlay "+" at 2549.21,649.61 h60 r90
C4_Z-axis: Top Overlay "+" at 2627.95,1476.38 h60 r90
C6: Top Overlay "+" at 1299.21,1643.7 h60 r180